# Altium PCB STM32F103T8+DCDCLMR16030_PcbDoc - Copy.PcbDoc
Units mm, origin at the board's own origin, x right, y up, seen from the top; angles counter-clockwise.
Board outline 152.4 x 101.6 mm, 2 copper layers (Top Layer, Bottom Layer); 36 components, 40 nets, 143 pads, 44 vias.
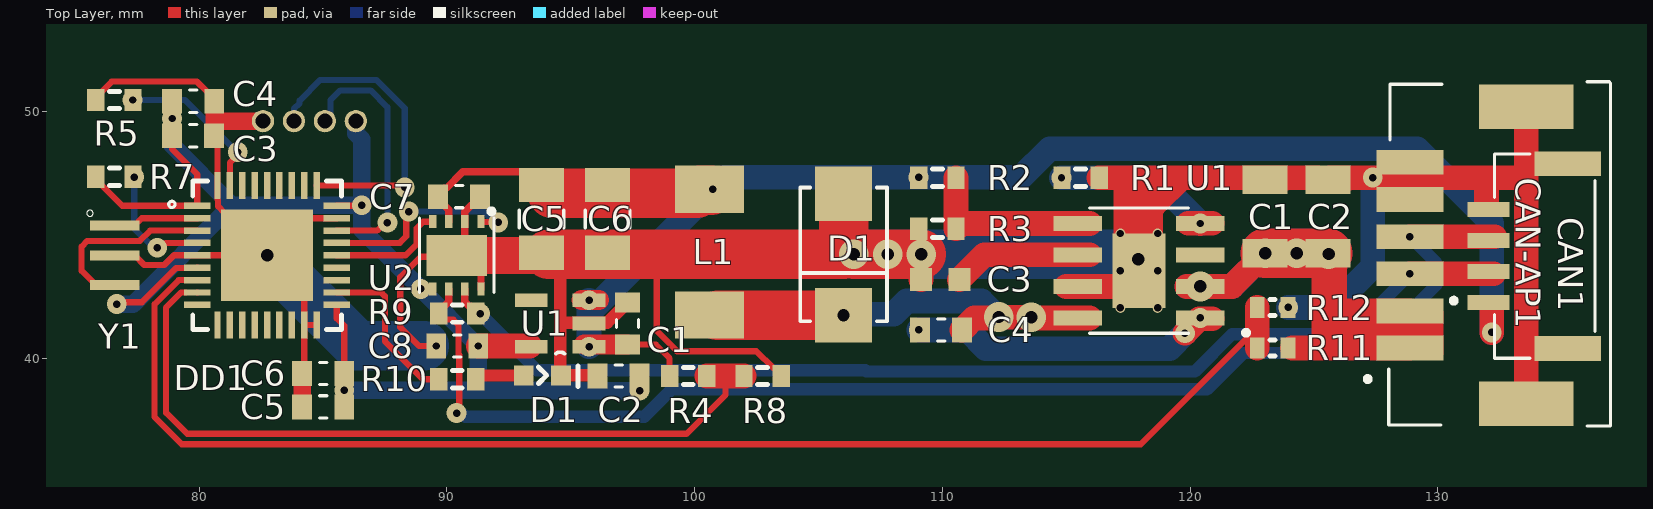
[diagram p0: Top Layer view]
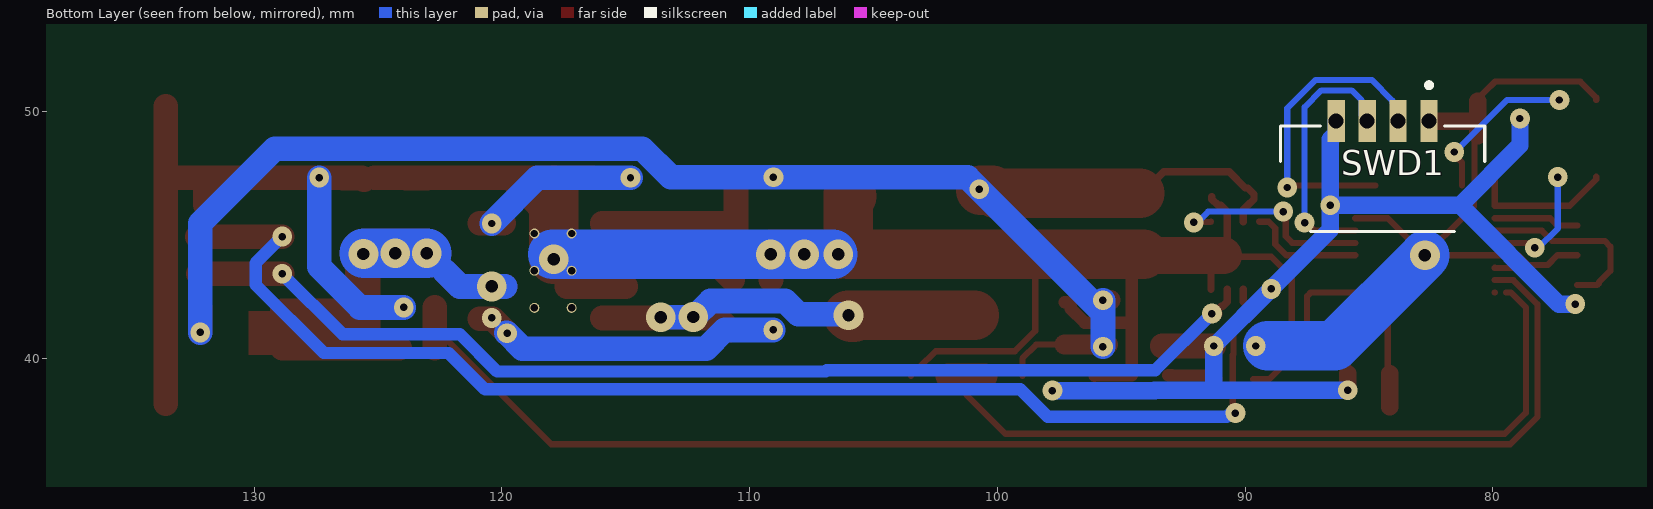
[diagram p1: Bottom Layer view, seen from below]
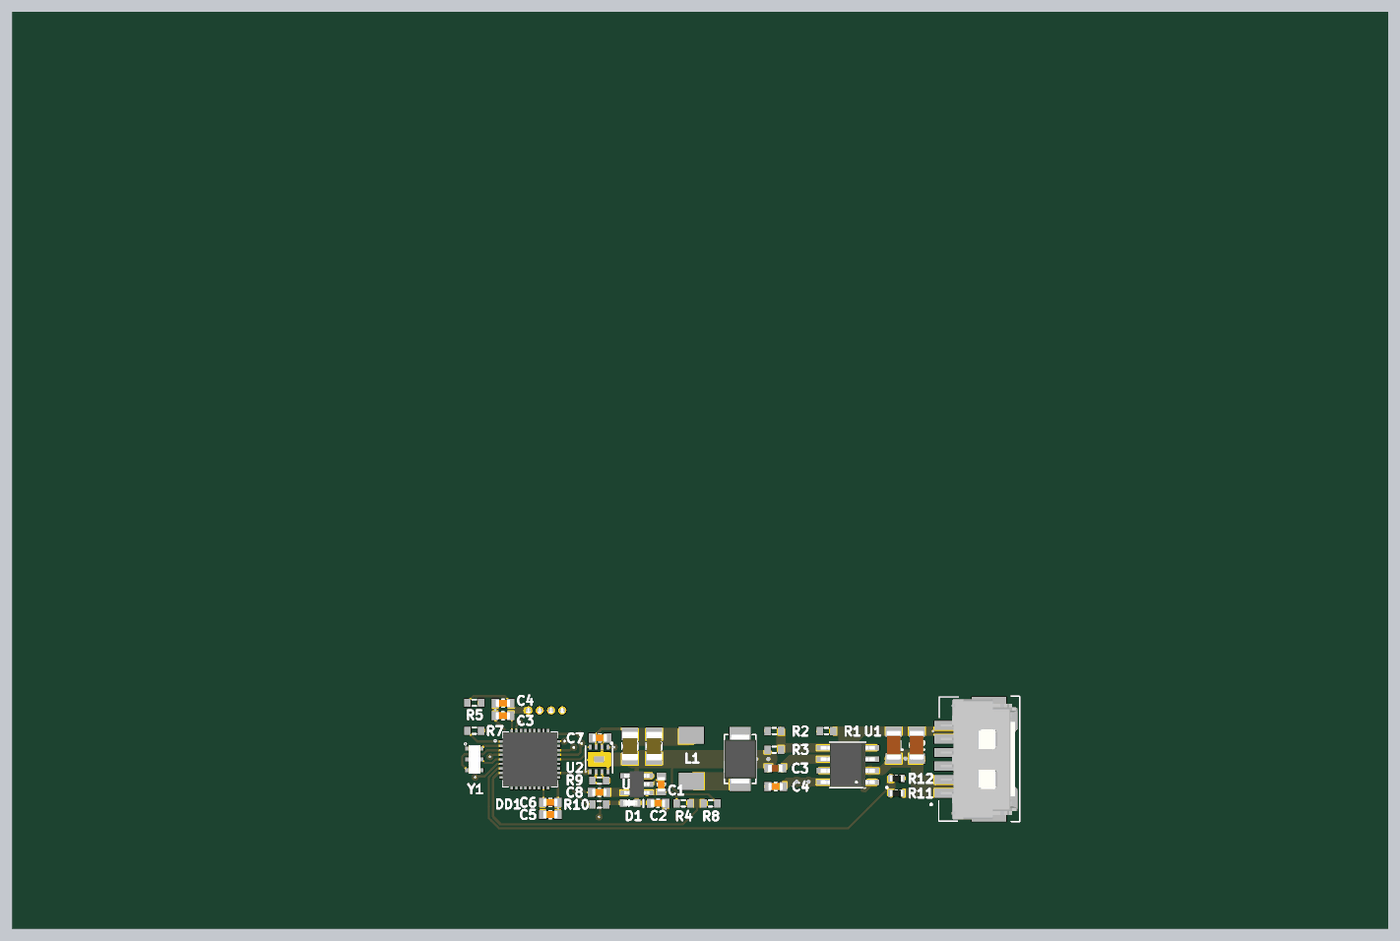
[diagram p2: 3D render of the assembled board from above, using the file's embedded part models]

## Layer stack, top to bottom
Top Solder: solder mask 0.0102, Solder Resist, Dk 3.5
Top Layer: signal copper 0.0356
Dielectric 1: dielectric 0.32, FR-4, Dk 4.8
Bottom Layer: signal copper 0.0356
Bottom Solder: solder mask 0.0102, Solder Resist, Dk 3.5

## Board outline
25.4,25.4 177.8,25.4 177.8,127 25.4,127

## Design rules (kind name [scope] priority, off if disabled: settings)
BoardOutlineClearance [All] p1: gap=0.25 ignorepadtopadclearanceinfootprint=FALSE
Clearance [All] p1: gap=0.17 ignorepadtopadclearanceinfootprint=FALSE
ComponentClearance [All] p1: gap=0.254 collisioncheckmode=3 verticalgap=2540 showdistances=FALSE
FanoutControl Fanout_SOIC [IsSOIC] p3: bgadir=Out bgaviamode=Closest fanoutstyle=Auto fanoutdirection=Alternating viagrid=0.025 // Fanout_SOIC (Default Rule)
FanoutControl Fanout_Small [(CompPinCount < 5)] p4: bgadir=Out bgaviamode=Closest fanoutstyle=Auto fanoutdirection=OutThenIn viagrid=0.025 // Fanout_Small (Default Rule)
FanoutControl Fanout_Default [All] p5: bgadir=In bgaviamode=Closest fanoutstyle=Auto fanoutdirection=Alternating viagrid=0.025 // Fanout_Default (Default Rule)
HoleSize [All] p1: absolutevalues=TRUE maxlimit=4.5 minlimit=0.3 maxpercent=80.000 minpercent=20.000
HoleToHoleClearance [All] p1: gap=0.4 allowstackedmicrovias=TRUE
MinimumSolderMaskSliver [All] p1: minsoldermaskwidth=0.15
PlaneClearance [All] p1: clearance=0.2
PlaneConnect [All] p1: planeconnectstyle=Relief reliefexpansion=0.5 reliefentries=4 reliefconductorwidth=0.2 reliefairgap=0.25
PolygonConnect PolygonConnect_1 [InNet('GND')] p1: connectstyle=Relief reliefconductorwidth=0.4 reliefentries=4 polygonreliefangle="45 Angle" airgapwidth=0.254
PolygonConnect [All] p2: connectstyle=Relief reliefconductorwidth=0.3 reliefentries=4 polygonreliefangle="90 Angle" airgapwidth=0.16
RoomDefinition STM32F103T8 [InComponentClass('STM32F103T8')] p1: confinementstyle=ConfineIn formatcopy=TRUE lockcomponents=FALSE outline 74.73,27.03 137.21,27.03 137.21,57.69 74.73,57.69
RoomDefinition DCDC-LMR16030 [InComponentClass('DCDC-LMR16030')] p2: confinementstyle=ConfineIn formatcopy=TRUE lockcomponents=FALSE outline 71.47,30.96 144.48,30.96 144.48,60.69 71.47,60.69
RoutingCorners [All] p1: cornerstyle=45-Degree minsetback=2.5 maxsetback=2.5
RoutingPriority [All] p1 off: routingpriority=0
RoutingVias [All] p1: holewidth=0.3 width=0.7 viastyle="Through Hole" minholewidth=0.3 minwidth=0.7 maxholewidth=0.8 maxwidth=1.2
SilkToSilkClearance [All] p1: silktosilkclearance=0
SilkToSolderMaskClearance [IsPad] p1: minsilkscreentomaskgap=0 clearancetoexposedcopper=TRUE
SolderMaskExpansion [All] p1: expansion=0.1 istentingtop=FALSE
Width [All] p1: maxlimit=5 minlimit=0.17 preferedwidth=0.3
17 further rules are at their usual default settings.

## Classes and differential pairs
component class STM32F103T8: C1 C2 C3 C4 C5 C6 C7 C8 CAN1 CAN-AP1 D1 DD1 R4 R5 R7 R8 R9 R10 R11 R12 SWD1 U1 U2 Y1
component class DCDC-LMR16030: C1 C2 C3 C4 C5 C6 D1 L1 R1 R2 R3 U1

## Components (designator, comment, footprint, x,y, rotation, side; value= is the part's Value field where it differs from the comment)
C1 "GX035C104MAT2-500" *CAPC1608X90 97.29,41.43 r90 top value=0.1u
C1 "GRM31CR71H225KA88L" *CAP3216X125N 123.029,45.747 r90 top value=2.2u
C2 "GX035C104MAT2-500" *CAPC1608X90 96.93,39.31 r180 top value=0.1u
C2 "GRM31CR71H225KA88L" *CAP3216X125N 125.569,45.747 r90 top value=2.2u
C3 "GX035C104MAT2-500" *CAPC1608X90 79.753,49.01 r0 top value=0.1u
C3 "GRM188R71C105KA12D" CAPC1608X90N 109.913,43.199 r0 top value=1u
C4 "GX035C104MAT2-500" *CAPC1608X90 79.756,50.4 r0 top value=0.1u
C4 "GX035C104MAT2-500" *CAPC1608X90 109.948,41.167 r180 top value=0.1u
C5 "GX035C104MAT2-500" *CAPC1608X90 85.005,38.06 r180 top value=0.1u
C5 "GRM31CR61A476KE15L" *CAPC3216X125N 93.819,45.651 r90 top value=47u
C6 "GX035C104MAT2-500" *CAPC1608X90 85.005,39.41 r180 top value=0.1u
C6 "GRM31CR61A476KE15L" *CAPC3216X125N 96.486,45.651 r90 top value=47u
C7 "GX035C104MAT2-500" *CAPC1608X90 90.49,46.55 r0 top value=0.1u
C8 "GX035C104MAT2-500" *CAPC1608X90 90.417,40.52 r180 top value=0.1u
CAN1 "502585-0670" MOLEX_502585-0670 129.07,44.185 r90 top
CAN-AP1 "SM04B-GHS-TB(LF)(SN)-" JST_SM04B-GHS-TB(LF)(SN)- 134.319,44.15 r90 top
D1 "0603-LED-BLUE" *LEDM1608X80_LTE-C1906R-14(Primary) 93.85,39.335 r180 top
D1 "SK56" *SMB_P6SMB62AT3G(Primary) 106.011,44.217 r270 top
DD1 "STM32F103T8" *QFN50P600X600X100-37N 82.74,44.18 r0 top
L1 "IHLP2020BZER100M01" IHLP 100.601,44.307 r270 top
R1 "Res3" J1-0603 115.577,47.317 r180 top value=56k
R2 "Res3" J1-0603 109.798,47.317 r180 top value=56k
R3 "RC0603FR-0710KL" J1-0603 109.798,45.25 r0 top value=10k
R4 "RC0603FR-0710KL" J1-0603 99.74,39.31 r180 top value=10k
R5 "RC0603FR-0710KL" J1-0603 76.577,50.45 r0 top value=10k
R7 "RC0603FR-0710KL" J1-0603 76.577,47.35 r0 top value=10k
R8 "RC0603FR-0710KL" J1-0603 102.74,39.31 r180 top value=10k
R9 "Res3" J1-0603 90.417,41.83 r0 top value=120
R10 "Res3" J1-0603 90.417,39.18 r0 top value=330
R11 "180K" "RES 0603 (1608X06L)" 122.71,40.44 r0 top
R12 "10K" "RES 0603 (1608X06L)" 123.954,42.07 r180 top
SWD1 "BM04B-GHS-TBT(LF)(SN)(N)" JST_BM04B-GHS-holes 84.45,46.249 r180 bottom
U1 "SPX3819M5-L-3-3/TR" *SOT95P280X145-5N 94.57,41.43 r180 top value=3V3
U1 "LMR16030SDDAR" "*SOIC127P600X170-9N - duplicate" 117.937,43.561 r180 top
U2 "TJA1042" SOT782-1 90.4,44.18 r180 top
Y1 "CSTCE8M00G55-R0" *OSC_CSTCE8M00G55-R0 76.59,44.18 r270 top

## Footprints (in the part's own frame and the unit in brackets; to place one, negate y for a bottom-side part, rotate by r counter-clockwise, add the part's x,y. Pads: shape width x height; smd on the part's side, far side on the other; paste and mask are expansions set on the pad)
*CAP3216X125N [mm]
  rect 1.15x1.82 smd: 1(-1.485,0) 2(1.485,0)
  body extent -1.6,-0.8 1.6,0.8, height 1.22
*CAPC1608X90 [mm]
  rect 0.8x1 smd: 1(-0.85,0) 2(0.85,0)
  silkscreen extent -0.15,-0.45 0.15,0.45, body extent -0.8,-0.4 0.8,0.41, height 0.88
*CAPC3216X125N [mm]
  rect 1.38x1.82 smd: 1(-1.369,0) 2(1.369,0)
  silkscreen extent -0.36,-0.9 0.36,0.9, body extent -1.6,-0.87 1.6,0.87, height 1.71
*LEDM1608X80_LTE-C1906R-14(Primary) [mm]
  rect 0.8x0.8 smd: A(0.75,0) C(-0.75,0)
  silkscreen extent -1.45,-0.38 0.16,0.45, body extent -0.8,-0.3 0.8,0.3, height 1.15
*OSC_CSTCE8M00G55-R0 [mm]
  rect 0.4x2 smd: 1(-1.2,0) 2(0,0) 3(1.2,0)
  silkscreen extent -1.83,-1.13 -1.57,-0.87, body extent -1.6,-0.65 1.6,0.65, height 1
*QFN50P600X600X100-37N [mm]
  rect 1.08x0.26 smd: 1(-2.815,2) 2(-2.815,1.5) 3(-2.815,1) 4(-2.815,0.5) 5(-2.815,0) 6(-2.815,-0.5) 7(-2.815,-1) 8(-2.815,-1.5) 9(-2.815,-2) 19(2.815,-2) 20(2.815,-1.5) 21(2.815,-1) 22(2.815,-0.5) 23(2.815,0) 24(2.815,0.5) 25(2.815,1) 26(2.815,1.5) 27(2.815,2)
  rect 0.26x1.08 smd: 10(-2,-2.815) 11(-1.5,-2.815) 12(-1,-2.815) 13(-0.5,-2.815) 14(0,-2.815) 15(0.5,-2.815) 16(1,-2.815) 17(1.5,-2.815) 18(2,-2.815) 28(2,2.815) 29(1.5,2.815) 30(1,2.815) 31(0.5,2.815) 32(0,2.815) 33(-0.5,2.815) 34(-1,2.815) 35(-1.5,2.815) 36(-2,2.815)
  rect 3.7x3.7 smd: 37(0,0)
  silkscreen extent -3.97,-3 3,3, body extent -3,-3 3,3, height 1
*SMB_P6SMB62AT3G(Primary) [mm]
  rect 2.2x2.3 smd: A(-2.45,0) C(2.45,0)
  silkscreen extent -2.7,-1.75 2.7,1.75, body extent -2.72,-1.78 2.72,1.78, height 2.49
"*SOIC127P600X170-9N - duplicate" [mm]
  rect 1.97x0.6 smd: 1(-2.475,1.905) 2(-2.475,0.635) 3(-2.475,-0.635) 4(-2.475,-1.905) 5(2.475,-1.905) 6(2.475,-0.635) 7(2.475,0.635) 8(2.475,1.905)
  round 0.4 hole 0.3: 9(-0.75,1.5) 9(-0.75,0) 9(-0.75,-1.5) 9(0.75,1.5) 9(0.75,0) 9(0.75,-1.5)
  rect 2.13x3 smd: 9(0,0)
  silkscreen extent -4.42,-2.52 2,2.6, body extent -3,-2.45 3,2.45, height 1.69
*SOT95P280X145-5N [mil]
  rect 52x22 smd: 1(-46,37) 2(-46,0) 3(-46,-37) 4(46,-37) 5(46,37)
  silkscreen extent -7,46 7,48, body extent -55,-57 55,57, height 57
CAPC1608X90N [mm]
  rect 0.89x0.93 smd: 1(-0.77,0) 2(0.77,0)
  body extent -0.8,-0.4 0.8,0.4, height 0.9
IHLP [mil]
  rect 75x110 smd: 1(-100,0) 2(100,0)
  body extent -100,-100 100,100, height 79
J1-0603 [mm] "Chip Resistor, Body 1.6x0.8mm, IPC High Density"
  rect 0.7x0.9 smd: 1(-0.75,0) 2(0.75,0)
  silkscreen extent -0.2,-0.35 0.2,0.35, body extent -0.85,-0.48 0.85,0.48, height 0.9
JST_BM04B-GHS-holes [mm]
  rect 0.7x1.7 / inner rect 0.6x1.7 / far side round 0.9 hole 0.6: 1(1.875,3.35) 2(0.625,3.35) 3(-0.625,3.35) 4(-1.875,3.35)
  silkscreen extent -4.13,-1.1 4.13,4.9, body extent -4.12,-1.02 4.12,3.93, height 4.15
JST_SM04B-GHS-TB(LF)(SN)- [mm]
  rect 0.6x1.7 smd: 1(-1.875,2.275) 2(-0.625,2.275) 3(0.625,2.275) 4(1.875,2.275)
  rect 1x2.7 smd: SH1(-3.725,-0.925) SH2(3.725,-0.925)
  silkscreen extent -4.13,-2.02 4.13,3.77, body extent -4.06,-2.16 4.19,2.69, height 4.35
MOLEX_502585-0670 [mm]
  rect 1x2.7 smd: 1(-3.75,0.2) 2(-2.25,0.2) 3(-0.75,0.2) 4(0.75,0.2) 5(2.25,0.2) 6(3.75,0.2)
  rect 1.8x3.8 smd: P1(-6,-4.5) P2(6,-4.5)
  silkscreen extent -6.9,-7.9 7,2, body extent -6.65,-7.68 6.65,0.82, height 6.41
"RES 0603 (1608X06L)" [mm] "Chip Resistor, 2-Leads, Body 1.6x0.8mm, IPC High Density _ (0.063W)"
  rect 0.6x0.85 smd: 1(0,0) 2(1.244,0)
  silkscreen extent 0.52,-0.33 0.72,0.33, body extent -0.14,-0.38 1.38,0.38, height 0.45
SOT782-1 [mm]
  rect 0.3x0.525 smd: 1(-0.975,-1.362) 2(-0.325,-1.362) 3(0.325,-1.362) 4(0.975,-1.362) 5(0.975,1.362) 6(0.325,1.362) 7(-0.325,1.362) 8(-0.975,1.362)
  rect 2.45x1.65 smd paste-2: P$9(0,0)
  silkscreen extent -1.5,-1.88 1.5,1.5, body extent -1.52,-1.52 1.52,1.52, height 0.85

## Part data
C1 C2 C3 C4 C4 C5 C6 C7 C8: "Cap Thin Film 0.1uf 50v 0603", Package="0603 AVX", MF=AVX, Pacage Metric=1608, SnapEDA_Link=https://www.snapeda.com/parts/GX035C104MAT2-500/AVX/view-part/?ref=snap, Type=SMD
  C1 C2: MP=GX035C104MAT2-500
  C3 C4 C4 C5 C6 C7 C8: MP="GX035C104MAT2-500 or CL10B104JB8NNNC"
C1 C2: "1206 2.2 uF 50 V В±10% Tolerance X7R SMT Multilayer Ceramic Capacitor", Package="1206 Murata", MF="Murata Electronics", MP=GRM31CR71H225KA88L, SnapEDA_Link=https://www.snapeda.com/parts/GRM31CR71H225KA88L/Murata%20Electronics%20North%20America/view-part/?ref=snap, Type=SMD
C3: "SMD Capacitor X7R(EIA) with Capacitance: 1.0uF Tol. 10%. Rated Voltage: 16Vdc", Package=0603, ChipDip_Link=https://www.chipdip.ru/product/grm188r71c105ka12d, HelpURL=https://static.chipdip.ru/lib/428/DOC005428493.pdf, MF="Murata Electronics", MP=GRM188R71C105KA12D, Pacage Metric=1608, SnapEDA_Link=https://www.snapeda.com/parts/GRM188R71C105KA12D/Murata%20Electronics%20North%20America/view-part/228340/?ref=snap, Type=SMD
C5 C6: "Multilayer Ceramic Capacitor, GRM Series, 47 - F, - 10%, X5R, 10 V, 1206 [3216 Metric]", Package="1206 Murata Electronics", MF="Murata Electronics", MP=GRM31CR61A476KE15L, SnapEDA_Link=https://www.snapeda.com/parts/GRM31CR61A476KE15L/Murata%20Electronics%20North%20America/view-part/?ref=snap, Type=SMD
CAN1: "1.50mm Pitch, CLIK-Mate PCB Receptacle, Single Row, Surface Mount, Right-Angle, Tin Plating, Positive Lock, 6 Circuits, Natural", Package=None, MF=Molex, MP=502585-0670, SnapEDA_Link=https://www.snapeda.com/parts/502494-0670/Molex/view-part/?ref=snap, System=Connector, Type=SMD
CAN-AP1: "Connector Header Surface Mount, Right Angle 4 position 0.049 _1.25mm_", Package=None, ChipDip_Link=https://www.chipdip.ru/product/sm04b-ghs-tb-lf-sn-gh-1.25mm-header-side-ent, HelpURL=http://www.farnell.com/datasheets/2082975.pdf, MF="JST Sales", MP=SM04B-GHS-TB(LF)(SN), SnapEDA_Link=https://www.snapeda.com/parts/SM04B-GHS-TB%28LF%29%28SN%29-/JST%20Sales%20America%20Inc./view-part/2759740/?ref=snap, System=Connector
D1: library part LTE-C1906R-14, "LED IrLED Chip LED 2-Pin SMD T/R", Package="0603 Lite-On", MP=0603-LED-BLUE, SnapEDA_Link=https://www.snapeda.com/parts/LTE-C1906R-14/Lite-On%20Inc./view-part/?ref=snap, Type=SMD
D1: "Диод Шоттки 5А 60В [SMB / DO-214AA]", Package="DO-214 Littelfuse", ChipDip_Link=https://www.chipdip.ru/product/sk56, MF="Littelfuse Inc.", MP=SK56, SnapEDA_Link=https://www.snapeda.com/parts/P6SMB62AT3G/Littelfuse%20Inc./view-part/?ref=snap, Type=SMD
DD1: "STM32F103T8U6, Микроконтроллер 32BIT ARM 64K FLASH [VFQFPN-36]", Package=VFQFPN-36, ChipDip_Link=https://www.chipdip.ru/product/stm32f103t8u6-2, HelpURL=http://www.st.com/stonline/products/literature/ds/13587.pdf, MF=STM, MP=STM32F103T8U6, SnapEDA_Link=https://www.snapeda.com/parts/STM32F103T8U6TR/STMicroelectronics/view-part/?ref=search&t=STM32F103T8U6, Type=SMD
L1: "10ÂµH Shielded Molded Inductor 2.3A 199mOhm Max Nonstandard", Package="Nonstandard Vishay", ChipDip_Link=https://www.chipdip.ru/product/ihlp2020bzer100m11-inductor-ihlp-smd-2020-10, HelpURL=http://www.vishay.com/docs/34253/ihlp-2020bz-01.pdf, MF="Vishay Dale", MP=IHLP2020BZER100M01, SnapEDA_Link=https://www.snapeda.com/parts/IHLP2020BZER100M01/Vishay%20Dale/view-part/44808/?ref=snap, Type=SMD
R1 R2 R10: "Resistor", Package=R0603, Pacage Metric=1608, Type=SMD
  R1 R2: ChipDip_Link=https://www.chipdip.ru/product0/9000079754, HelpURL=https://www.chipdip.ru/product0/9000079754, MP=RC0603FR-0756KL
  R10: ChipDip_Link=https://www.chipdip.ru/product0/9000079628, HelpURL=https://www.chipdip.ru/product0/9000079628, MP=RC0603FR-07330RL
R3 R4 R5 R7 R8: "10 kOhms 1 0.1 W 1 10 W Chip Resistor 0603 1608 Metric Thick Film", Package=R0603, ChipDip_Link=https://www.chipdip.ru/product0/9000079736, HelpURL=https://www.chipdip.ru/product0/9000079736, MF="Yageo or NXP", MP="10K 1% 0603", Pacage Metric=1608, SnapEDA_Link=https://www.snapeda.com/parts/RC0603FR-0710KL/Yageo/view-part/?ref=dk&t=RC0603FR-0710KL&con_ref=None, Type=SMD
R9: "120 Ohms 1 0.1 W 1 10 W Chip Resistor 0603 1608 Metric Thick Film", Package=R0603, ChipDip_Link=https://www.chipdip.ru/product0/9000079618, HelpURL=https://www.chipdip.ru/product0/9000079618, MP=RC0603FR-07120RL, Pacage Metric=1608, Type=SMD
R11 R12: library part Resistor, "Resistor", Power="1/8 W", Tolerance=5%
SWD1: "Conn Shrouded Header HDR 4 POS 1.25mm Solder ST SMD Reel", Package=None, Instructions="Do not install", MF="JST Sales", MP=SM04B-GHS-TB(LF)(SN), SnapEDA_Link=https://www.snapeda.com/parts/BM04B-GHS-TBT%28LF%29%28SN%29%28N%29/JST%20Sales%20America%20Inc./view-part/?ref=snap, System=Connector, Type=SMD
U1: library part SPX3819M5-L, "Low Dropout Voltage Regulator, Adjustable 0.5A, В±1%, 2.5 to 16 Vin, 5-Pin SOT-23", Package="SOT-23-5 Exar", ChipDip_Link=https://www.chipdip.ru/product1/8003455237, HelpURL=http://www.farnell.com/datasheets/2614478.pdf, MF="MaxLinear, Inc.", MP=SPX3819M5-L-3-3/TR, SnapEDA_Link=https://www.snapeda.com/parts/SPX3819M5-L/MaxLinear%2C%20Inc./view-part/?ref=snap, Type=SMD
U1: "LMR16030SDDAR, Conv DC-DC 4.3V to 60V Step Down Single-Out 1V to 50V 3A Automotive 8-Pin HSOP EP T/R", Package="PowerSOIC-8 Texas Instruments", ChipDip_Link=https://www.chipdip.ru/product1/8003448566, HelpURL=https://www.ti.com/lit/ds/symlink/lmr16030.pdf, MF="Texas Instruments", MP=LMR16030SDDAR, SnapEDA_Link=https://www.snapeda.com/parts/TPS54560DDA/Texas%20Instruments/view-part/?ref=snap, Type=SMD
U2: "1/1 Transceiver Half CANbus 8-SO", Package="VDFN-8 NXP USA", ChipDip_Link=https://www.chipdip.ru/product1/8002840332, HelpURL=https://static.chipdip.ru/lib/583/DOC001583059.pdf, MF="NXP USA", MP=TJA1042, SnapEDA_Link=https://www.snapeda.com/parts/TJA1042/NXP%20USA%20Inc./view-part/900919/?ref=snap, Type=SMD
Y1: "Ceramic Resonator 8MHz ??0.5% _Tol_ ??0.2% _Stability_ 33pF 40Ohm 3-Pin CSMD T/R", Package="SMD-3 Murata", ChipDip_Link=https://www.chipdip.ru/product1/8001783721, HelpURL=https://www.murata.com/en-eu/api/pdfdownloadapi?cate=&partno=CSTCE8M00G55-R0, MF=Murata, MP=CSTCE8M00G55-R0, SnapEDA_Link=https://www.snapeda.com/parts/CSTCE8M00G55-R0/Murata%20Electronics%20North%20America/view-part/?ref=snap, Type=SMD

## Via types
v1: diameter 0.8, hole 0.3, Top Layer to Bottom Layer, tented both sides, 32 vias
v2: diameter 1.2, hole 0.5, Top Layer to Bottom Layer, tented both sides, 12 vias

## Nets (pads, with @x,y where several pads share a name; then routed paths per layer and width w, separated by ;. In a path a pad name is that pad's centre, name@x,y a point inside that pad or via, vN(x,y) a via of type N, cw(c..) or ccw(c..) an arc to the next point about the centre after c; other vN are vias at no path point)
3.3: C2.1@97.78,39.31 C3.1@78.903,49.01 C4.1@78.906,50.4 C5.1@85.855,38.06 C6.1@85.855,39.41 C8.1 DD1.1 DD1.6 DD1.19 DD1.27 R7.1 SWD1.4 U1.5@93.402,40.49 U2.5 | length 59.3
  Top Layer w0.25: R7.1 75.827,47.25 76.896,46.18 DD1.1 79.925,47.445 78.903,48.467 C3.1@78.903,49.01 ; v1(76.67,42.21) 76.75,42.29 77.687,42.29 79.072,43.675 79.92,43.675 DD1.6 ; DD1.19 85.555,41.635 85.855,41.335 C6.1@85.855,39.41 ; DD1.27 85.56,46.185 86.546,46.185 v1(86.561,46.2)
  Top Layer w0.7: v1(85.855,38.735) C6.1@85.855,39.41
  Top Layer w1: v1(91.267,40.52) U1.5@93.34,40.52
  Bottom Layer w0.7: v1(76.67,42.21) 77.331,42.21 81.321,46.2 ; v1(78.905,49.705) 78.905,48.616 81.321,46.2 ; v1(85.855,38.735) 85.86,38.73 91.267,38.73 ; SWD1.4 86.325,49.099 86.561,48.863 v1(86.561,46.2) ; 93.64,38.72 v1(97.78,38.72) ; 93.64,38.73 91.267,38.73 ; 81.321,46.2 v1(86.561,46.2) ; v1(86.561,46.2) 86.561,45.212 v1(88.945,42.828) 91.253,40.52 v1(91.267,40.52) 91.267,38.73
+5: C1.1@97.29,40.58 C5.2@93.819,47.02 C6.2@96.486,47.02 C7.1 CAN-AP1.1 L1.1 R2.2 R4.2 U1.1@95.738,40.49 U1.3@95.738,42.37 U2.3 | length 65.6
  Top Layer w0.25: C1.1@97.29,40.58 98.427,40.58 98.99,40.017 R4.2
  Top Layer w0.3: U2.3 90.075,46.024 89.899,46.2 89.89,46.2 89.64,46.45 C7.1 89.64,46.65 89.89,46.9 89.99,46.9 90.64,47.55 93.289,47.55 C5.2@93.819,47.02
  Top Layer w0.8: U1.3@95.43,42.38 96.14,42.38 U1.3@96.133,42.373 ; U1.1@95.53,40.58 C1.1@97.29,40.58 ; v1(95.738,42.37) U1.3@96.13,42.37
  Top Layer w1: v1(132.18,41.07) CAN-AP1.1@132.18,42.075
  Top Layer w2: C5.2@94.25,46.68 100.085,46.68 100.204,46.799 L1.1@100.679,46.799
  Bottom Layer w1: v1(95.738,40.49) v1(95.738,42.37) ; v1@95.89,42.01 v1(100.73,46.85) 101.21,47.33 v1(109.04,47.33) 113.175,47.33 114.332,48.487 129.173,48.487 132.18,45.48 v1(132.18,41.07)
ADC_5V: DD1.8 R4.1 R8.2 | length 31.2
  Top Layer w0.25: DD1.8@79.467,42.68 79.264,42.68 78.663,42.078 78.663,37.827 79.515,36.975 99.675,36.975 101.24,38.54 101.24,39.31 ; DD1.8@79.92,42.675 DD1.8
  Top Layer w1: R4.1 101.24,39.31 R8.2
ADC_CUR: DD1.10
ADC_VIN: DD1.7 R11.1 R12.2 | length 55.2
  Top Layer w0.25: DD1.7 79.171,43.18 78.2,42.209 78.2,37.65 79.295,36.555 118.01,36.555 122.71,41.255
  Top Layer w1: R11.1 122.71,41.255 R12.2
BOOT0: DD1.35 R5.2 | length 6.6
  Top Layer w0.25: v1(77.31,50.45) R5.2 ; DD1.35 81.24,47.916 81.56,48.236 v1(81.56,48.351)
  Bottom Layer w0.25: v1(77.31,50.45) 79.433,50.45 81.532,48.351 v1(81.56,48.351)
CAN_H: CAN1.3 CAN-AP1.2 R9.2 U2.7 | length 44.9
  Top Layer w0.3: U2.7 90.725,42.306 90.901,42.13 90.967,42.13 91.167,41.93 R9.2
  Top Layer w0.5: R9.2 v1(91.34,41.83)
  Top Layer w1: v1(128.87,43.435) CAN-AP1.2@132.25,43.435
  Bottom Layer w0.5: v1(91.34,41.83) 93.63,39.54 106.885,39.54 106.935,39.49 120.19,39.49 121.7,41 126.435,41 v1(128.87,43.435)
CAN_L: CAN1.4 CAN-AP1.3 R9.1 U2.6 | length 53.4
  Top Layer w0.25: R9.1 89.667,41.81 89.892,41.585 90.255,41.585 90.472,41.369 90.472,40.191 90.501,40.162 90.501,38.231 90.495,38.226 90.495,37.915 v1(90.39,37.81)
  Top Layer w0.3: R9.1 89.667,41.93 89.867,42.13 89.899,42.13 90.075,42.306 U2.6
  Top Layer w1: v1(128.87,44.935) CAN-AP1.3@132.3,44.935
  Bottom Layer w0.5: v1(90.39,37.81) 90.447,37.753 90.66,37.753 90.742,37.67 97.97,37.67 99.07,38.77 120.68,38.77 122.15,40.24 127.188,40.24 129.94,42.992 129.94,43.865 v1(128.87,44.935)
CAN_RXD: DD1.23 U2.4 | length 4.8
  Top Layer w0.25: DD1.23 88.33,44.18 88.781,44.631 88.781,45.271 89.046,45.536 89.419,45.536 U2.4
CAN_TXD: DD1.24 U2.1 | length 8.5
  Top Layer w0.25: DD1.24 88.093,44.68 88.361,44.948 88.361,45.844 v1(88.462,45.945) ; U2.1 91.391,45.526 92.054,45.526 v1(92.07,45.51)
  Bottom Layer w0.25: v1(88.462,45.945) 91.486,45.945 91.921,45.51 v1(92.07,45.51)
FB: R2.1 R3.2 U1.5@115.462,45.466 | length 7.6
  Top Layer w1: R2.1 R3.2 110.764,45.466 115.462,45.466 U1.5@115.95,45.466
GND: C1.2 C2.2 C3.1@109.143,43.199 C3.2@80.603,49.01 C4.2@80.606,50.4 C5.1@93.819,44.282 C5.2@84.155,38.06 C6.1@96.486,44.282 C6.2@84.155,39.41 C7.2 C8.2 CAN1.5 CAN1.6 CAN1.P1 CAN1.P2 CAN-AP1.4 CAN-AP1.SH1 CAN-AP1.SH2 D1.A@106.011,46.667 D1.C@94.6,39.335 DD1.5 DD1.17 DD1.18 DD1.26 DD1.36 DD1.37 R1.1 R3.1 R5.1 R8.1 R12.1 SWD1.1 U1.2@95.738,41.43 U1.7 U1.9 U2.2 U2.8 U2.P$9 Y1.2 | length 145.9
  Top Layer w0.25: R5.1 75.827,50.55 76.472,51.195 79.911,51.195 80.331,50.775 80.606,50.5 C4.2@80.606,50.4 ; Y1.2 77.39,44.18 77.78,43.79 78.593,43.79 78.983,44.18 DD1.5 v2(82.74,44.18) ; C3.2@80.74,48.847 DD1.36 80.745,46.99 80.745,46.447 80.76,46.432 80.76,46.16 81.015,45.905 81.159,45.762 v2(82.74,44.18) ; C6.2@84.155,39.41 84.24,39.495 DD1.17 ; DD1.18 DD1.17 ; DD1.26 84.24,45.68 v2(82.74,44.18) ; v1(89.567,40.52) 88.881,40.52 88.12,41.281 88.12,43.3 88.946,44.126 90.346,44.126 U2.P$9 ; 98.47,44.217 98.47,41.131 99.291,40.31 102.49,40.31 103.165,39.635 103.265,39.635 103.49,39.41 R8.1 ; v2(82.74,44.18) 84.24,42.68 DD1.17
  Top Layer w0.3: C7.2 91.34,46.45 91.09,46.2 90.99,46.2 90.725,45.935 U2.2 90.725,44.322 90.875,44.172 91.375,43.672 U2.8
  Top Layer w0.5: C5.1@93.819,44.282 94.039,44.282 94.104,44.217 94.479,43.842 94.479,43.622 94.571,43.53 94.571,41.459 ; D1.C@94.571,39.335 94.571,41.459 ; D1.C@94.6,39.335 96.055,39.335 C2.2@96.08,39.31 ; C1.2@97.29,42.28 97.19,42.28 97.04,42.13 97.04,42.03 96.469,41.459 95.768,41.459 95.738,41.43 95.709,41.459 94.571,41.459
  Top Layer w0.7: C3.2@80.603,49.01 80.605,49.012 80.605,50.398 C4.2@80.606,50.4 ; 80.954,49.599 SWD1.1 ; C5.2@84.155,38.06 C6.2@84.155,39.41
  Top Layer w1: C3.1@109.143,43.199 v2(109.143,44.217) ; U1.7@115,42.926 U1.7 U1.9@117.372,42.926 ; R1.1 119.65,47.317 ; 118.096,46.217 118.55,46.217 119.65,47.317 ; C1.2@123.029,47.307 123.882,47.307 123.885,47.31 C2.2@125.156,47.31 ; C1.2@123.029,47.317 119.65,47.317 ; C2.2@125.569,47.232 125.644,47.307 126.422,47.307 126.432,47.317 v1(127.377,47.317) 131.97,47.317 ; CAN-AP1.4@131.97,46.225 131.97,47.317 ; CAN1.P1 133.57,47.317 ; CAN1.P2 133.57,47.317 ; 131.97,47.317 133.57,47.317
  Top Layer w1.5: U2.P$9@90.875,44.172 93.61,44.172 93.659,44.222 93.759,44.222 C5.1@93.819,44.282
  Top Layer w2: C5.1@94.104,44.217 98.47,44.217 v2@105.884,44.217 ; D1.A@105.884,46.567 105.984,46.667 D1.A@106.011,46.667 ; v2@106.011,44.22 D1.A@106.011,46.567 ; v2(106.42,44.22) v2(107.79,44.22) 109.14,44.22 v2(109.143,44.217) ; 117.909,46.83 117.91,46.829 v2(117.91,44.02)
  Bottom Layer w1: v1(123.96,42.08) 125.741,42.08 127.377,43.716 v1(127.377,47.317)
  Bottom Layer w2: v2(82.74,44.18) 86.39,40.53 89.093,40.53 ; v2@106.65,44.22 v2(107.79,44.22) v2@117.95,44.22
LED: DD1.20 R10.1 | length 6.6
  Top Layer w0.25: DD1.20 87.354,42.68 87.5,42.534 87.5,40.71 89.03,39.18 R10.1
MISO/ADC_VC: DD1.13
MOSI/ADC_MID: DD1.14
NetC3_2: C3.2@110.683,43.199 U1.6 | length 5.7
  Top Layer w1: C3.2@110.683,43.199 111.687,44.202 U1.6@115.94,44.202
NetC4_1: C4.1@110.798,41.167 D1.C@106.011,41.767 L1.2 U1.8 | length 18.5
  Top Layer w1: C4.1@110.798,41.167 111.287,41.656 v2@112.28,41.656 ; v2(112.28,41.69) 112.29,41.68 v2(113.59,41.68) ; v2@113.59,41.656 U1.8 U1.8@115.94,41.656
  Top Layer w2: L1.2@100.931,41.757 D1.C@105.794,41.757 ; D1.C@105.794,41.677 ccw(c105.794,41.984) v2(106.011,41.767)
  Bottom Layer w1: v2(106.011,41.767) 106.049,41.805 108.031,41.805 108.565,42.34 111.576,42.34 v2@112.231,41.685 ; v2@112.28,41.685 113.585,41.685 v2(113.59,41.68)
NetC4_2: C4.2@109.098,41.167 U1.1@120.412,41.656 | length 12.7
  Top Layer w1: v1(119.789,41.033) 120.376,41.62 U1.1@120.89,41.62
  Bottom Layer w1: v1(109.05,41.17) 111.004,41.17 111.764,40.41 119.166,40.41 v1(119.789,41.033) v1@119.813,41.057
  other v1: 120.412,41.656
NetD1_A: D1.A@93.1,39.335 R10.2 | length 2
  Top Layer w0.5: R10.2 91.167,39.23 91.267,39.33 92.95,39.33 92.955,39.335 D1.A@93.1,39.335
NetR1_2: R1.2 U1.4@120.412,45.466 | length 7.3
  Top Layer w1: U1.4@119.94,45.48 U1.4@120.398,45.48 ; v1(120.412,45.466) U1.4@120.398,45.48 ; U1.4@120.88,45.48 U1.4@120.398,45.48
  Bottom Layer w1: v1(114.81,47.31) 118.568,47.31 v1(120.412,45.466)
NetU1_3: U1.3@120.412,44.196
NSS/ADC_VA: DD1.11
OSC_IN: DD1.2 Y1.1 | length 3.5
  Top Layer w0.25: Y1.1 77.39,45.38 77.465,45.455 77.465,45.465 77.68,45.68 DD1.2
OSC_OUT: DD1.3 Y1.3 | length 7.5
  Top Layer w0.25: Y1.3 75.79,42.98 75.715,43.055 75.715,43.095 75.25,43.56 75.25,44.53 75.48,44.76 77.597,44.76 78.017,45.18 DD1.3
PWM2A: DD1.29
PWM2B: DD1.30
PWM2C: DD1.9
PWM3A: DD1.31
PWM3B: DD1.32
PWM3C: DD1.15
RX: DD1.22
SCK/ADC_VB: DD1.12
SCL/PWM4A: DD1.33
SDA/PWM4B: DD1.34
STM_NRST: DD1.4 R7.2 | length 5
  Top Layer w0.25: v1(78.305,44.485) 78.454,44.485 78.649,44.68 DD1.4
  Bottom Layer w0.25: v1(77.38,47.34) 77.38,45.262 78.156,44.485 v1(78.305,44.485)
SWDIO: DD1.25 SWD1.3 | length 10.5
  Top Layer w0.25: DD1.25 87.179,45.18 87.498,45.5 v1(87.6,45.5)
  Bottom Layer w0.25: SWD1.3 85.3,49.824 85.3,50.44 85.7,50.84 86.92,50.84 87.6,50.16 v1(87.6,45.5)
SWLK: DD1.28 SWD1.2 | length 12.8
  Top Layer w0.25: DD1.28 88.22,46.995 v1(88.295,46.92)
  Bottom Layer w0.25: SWD1.2 83.825,50.099 84.05,50.324 84.05,50.424 84.886,51.26 87.15,51.26 88.295,50.115 v1(88.295,46.92)
TX: DD1.21
VERSION: DD1.16
Vin: C1.1@123.029,44.262 C2.1@125.569,44.262 CAN1.1 CAN1.2 R11.2 U1.2@120.412,42.926 | length 23.3
  Top Layer w1: U1.2@119.868,42.925 U1.2@120.41,42.925 ; v2(120.412,42.926) 121.693,42.926 v2(123.029,44.262) ; R11.2@124.129,40.435 CAN1.1 ; v2(125.59,44.234) 125.753,44.234 125.8,44.187 125.8,42.64 ; 125.8,40.72 125.8,41.91 125.825,41.935 CAN1.2
  Top Layer w2: v2(123.029,44.262) C2.1@125.562,44.262
  Bottom Layer w1: v2@119.87,42.926 v2(120.412,42.926) ; v2@120.41,42.925 121.691,42.925 v2@123.027,44.261
  Bottom Layer w2: v2(123.029,44.262) v2@125.562,44.262
  other v2: 124.31,44.27
pads on no net: U1.4@93.402,42.37

## Other copper
Top Layer:
  rectangle net Vin: 124.9,40.61 126.33,44.69
  rectangle net Vin: 125.62,40.16 130.22,41.935